# Altium PCB eSAS_BNC_fanout.PCBDOC
Units mil, origin at the board's own origin, x right, y up, seen from the top; angles counter-clockwise.
Board outline 4226.66 x 2258.09 mil, 2 copper layers (TopLayer, BottomLayer), stack 61.855 mil thick; 68 components, 47 nets, 212 pads, 750 vias.
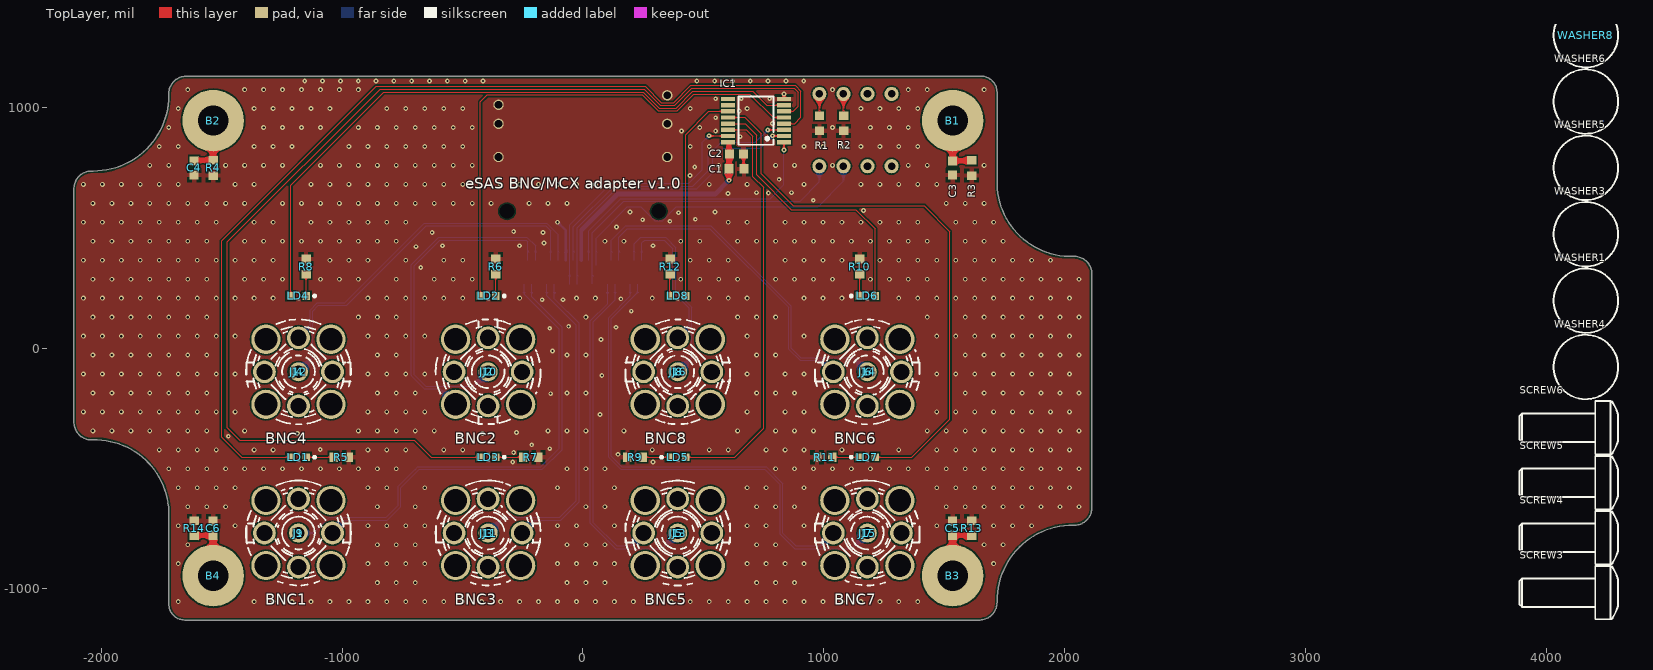
[diagram p0: TopLayer view]
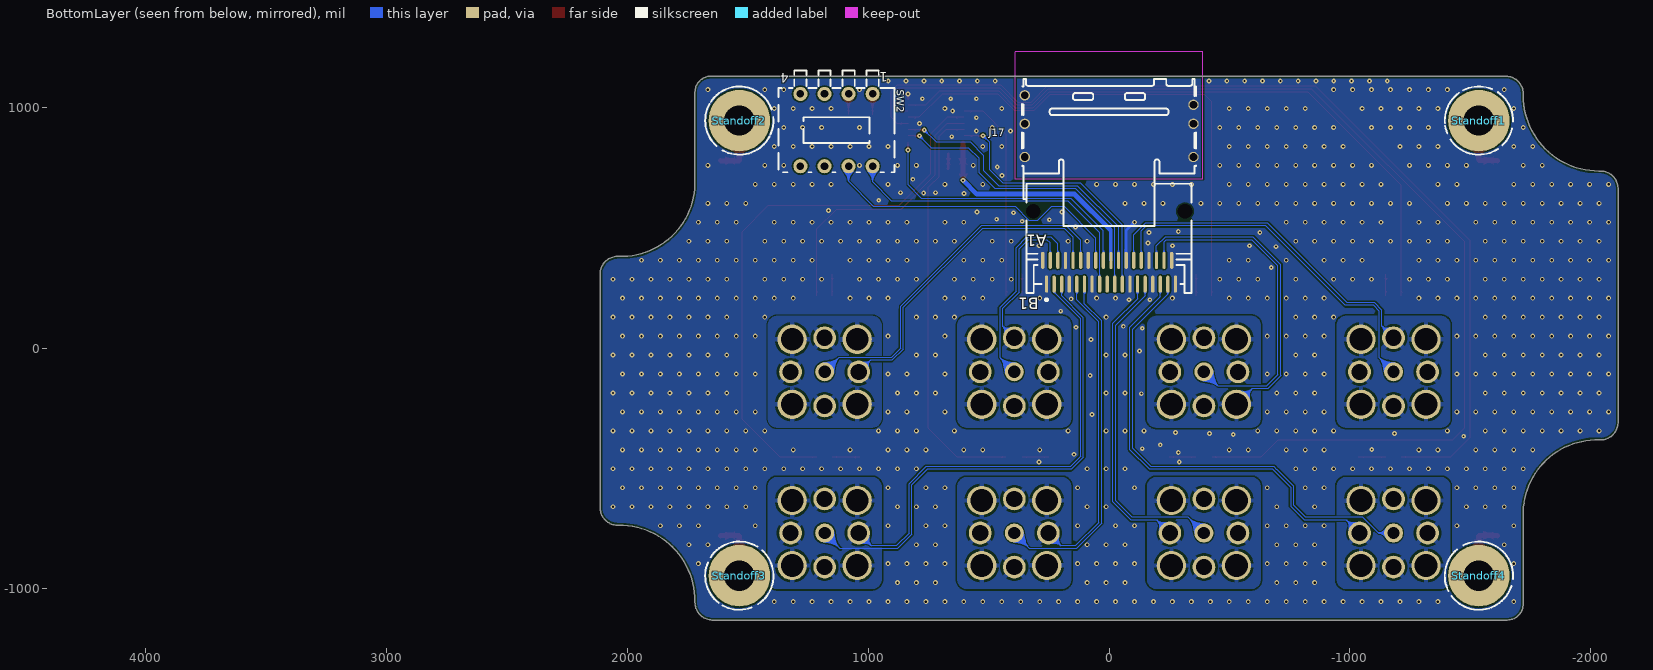
[diagram p1: BottomLayer view, seen from below]

## Layer stack, top to bottom
TopSolder: solder mask 0.4, Solder Resist, Dk 3.5
TopLayer: signal copper 1.4
Dielectric 3: prepreg 59.0551, Dk 4.2
BottomLayer: signal copper 1.4
BottomSolder: solder mask 0.4, Solder Resist, Dk 3.5

## Board outline
-1719.62,-1062.45 -1719.62,-680.62 -1719.63,-679.6 ccw(c-2026.62,-688.03) -2035.06,-381.04 -2036.51,-381.06 cw(c-2040.37,-308.08) -2113.03,-315.93 -2113.29,-311.33 -2113.29,665.65 -2113.04,670.26 cw(c-2040.38,662.41) -2036.51,735.4 -2033.49,735.32 ccw(c-2033.5,1049.25) -1719.58,1049.25 -1719.65,1052.27 cw(c-1646.66,1056.13) -1654.52,1128.79 -1649.91,1129.05 1653.55,1129.05 1653.77,1129.04 cw(c1653.55,1063) 1719.58,1063.22 1719.6,1063 1719.6,681.17 1719.63,679.6 ccw(c2026.63,688.04) 2035.07,381.05 2036.52,381.07 cw(c2040.38,308.09) 2113.04,315.94 2113.3,314.97 2113.3,-665.64 2113.36,-666.27 cw(c2040.38,-662.41) 2036.52,-735.39 2036.12,-735.33 ccw(c2033.5,-1049.24) 1719.59,-1051.87 1719.75,-1056.12 cw(c1646.67,-1056.12) 1654.52,-1128.78 1649.91,-1129.04 -1653.54,-1129.04 -1653.76,-1129.03 cw(c-1653.54,-1062.99)

## Design rules (kind name [scope] priority, off if disabled: settings)
BoardOutlineClearance [All] p1: gap=10 ignorepadtopadclearanceinfootprint=FALSE except(0: Arc-SplitContinuation Track-SplitContinuation SMDPad-SplitContinuation THPad-SplitContinuation Via-SplitContinuation Fill-SplitContinuation Poly-SplitContinuation Region-SplitContinuation Text-SplitContinuation)
Clearance [All] p1: gap=6 ignorepadtopadclearanceinfootprint=FALSE
ComponentClearance ComponentClearance_standof_MH [HasFootprint('ETTINGER_005.13.103') vs HasFootprint('MTG270_500')] p1: gap=10 collisioncheckmode=3 verticalgap=-275.59 showdistances=FALSE
ComponentClearance ComponentClearance_BNC_SPX [HasFootprint('AMPHENOL_919-109J-51PX') vs HasFootprint('TYCO_5-1634506-1')] p2: gap=-393.7 collisioncheckmode=3 verticalgap=100000 showdistances=TRUE
ComponentClearance [All] p3: gap=0 collisioncheckmode=3 verticalgap=100000 showdistances=FALSE
DiffPairsRouting [InDifferentialPairClass('All Differential Pairs')] p1: maxlimit=5 minlimit=5 mostfreqgap=5 toplayer_minwidth=150.47 toplayer_maxwidth=150.47 toplayer_prefwidth=150.47 bottomlayer_minwidth=150.47 bottomlayer_maxwidth=150.47 bottomlayer_prefwidth=150.47 impedanceprofiledriven=TRUE impedanceprofileid={AE919443-835C-48A8-A9B8-3D3E97AE2A3C} impedanceprofilevalue=50.000000 maxuncoupledlength=500
FabricationTestPointUsage TestPointUsage [All] p1: valid=0 allowmultiple=FALSE
FabricationTestpoint Testpoint [All] p1: side=3 testpointundercomponent=TRUE minsize=40 maxsize=100 preferedsize=60 minholesize=20 maxholesize=40 preferedholesize=32 testpointgrid=1 allowsidetop=TRUE allowsidebottom=TRUE usegrid=TRUE gridtolerance=0.01
Height [All] p1: minheight=0 maxheight=1574.8 prefheight=1574.8
HoleSize [All] p1: absolutevalues=TRUE maxlimit=150 minlimit=1 maxpercent=80.000 minpercent=20.000
HoleToHoleClearance HoleToHoleClearance_standoff_to_MH [HasFootprint('MTG270_500') vs HasFootprint('ETTINGER_005.13.103')] p1: gap=-275.59 allowstackedmicrovias=TRUE
HoleToHoleClearance HoleToHoleClearance_BNC_ZPX [HasFootprint('AMPHENOL_919-109J-51PX') vs HasFootprint('TYCO_5-1634506-1')] p2: gap=-393.7 allowstackedmicrovias=TRUE
HoleToHoleClearance [All] p3: gap=1 allowstackedmicrovias=TRUE
MinimumSolderMaskSliver [All] p1: minsoldermaskwidth=0
PlaneClearance [All] p1: clearance=7.87
PlaneConnect [All] p1: planeconnectstyle=Direct reliefexpansion=20 reliefentries=4 reliefconductorwidth=10 reliefairgap=10
PolygonConnect PolygonConnect_eSAS [All vs HasFootprint('MOLEX_75783-0107')] p1: connectstyle=Direct reliefconductorwidth=10 reliefentries=4 polygonreliefangle="90 Angle" airgapwidth=10
PolygonConnect PolygonConnect_pad [(InPadClass('All Pads'))] p2: connectstyle=Relief reliefconductorwidth=19.68 reliefentries=4 polygonreliefangle="90 Angle" airgapwidth=10
PolygonConnect [All] p3: connectstyle=Direct reliefconductorwidth=10 reliefentries=4 polygonreliefangle="45 Angle" airgapwidth=10
RoutingVias [All] p1: holewidth=7.87 width=19.68 viastyle="Through Hole" minholewidth=7.87 minwidth=19.68 maxholewidth=28 maxwidth=50
SilkToSilkClearance [All] p1: silktosilkclearance=0
SilkToSolderMaskClearance SilkscreenOverComponentPads [IsPad] p1: minsilkscreentomaskgap=0 clearancetoexposedcopper=TRUE
SolderMaskExpansion [All] p1: expansion=2 istentingtop=FALSE
SupplyNets "Schematic Supply Nets" [InNet('AFE0_CSN1')] p1 off: voltage=0.000
SupplyNets "Schematic Supply Nets_2" [InNet('GND')] p2 off: voltage=0.000
ViasUnderSMD [All] p1 off: allowed=FALSE
Width [All] p1: maxlimit=50 minlimit=5 preferedwidth=5
18 further rules are at their usual default settings.

## Components (designator, comment, footprint, x,y, rotation, side; value= is the part's Value field where it differs from the comment)
B1 "Plated Hole" MTG270_500 1535.44,944.89 r0 top
B2 "Plated Hole" MTG270_500 -1535.43,944.89 r0 top
B3 "Plated Hole" MTG270_500 1535.44,-944.88 r0 top
B4 "Plated Hole" MTG270_500 -1535.43,-944.88 r0 top
C1 "100nF" CAPC1608X87N 637.8,744.09 r180 top
C2 "22uF" CAPC1608X90N 637.8,807.09 r180 top
C3 "100nF" CAPC1608X90N 1535.44,748.04 r270 top
C4 "100nF" CAPC1608X90N -1614.17,748.03 r270 top
C5 "100nF" CAPC1608X90N 1535.43,-748.03 r90 top
C6 "100nF" CAPC1608X90N -1535.43,-748.03 r90 top
IC1 "CD74HC4094PW" SOP65P640X120-16N 718.5,944.88 r180 top
J1 "BNC" TYCO_5-1634506-1 -1181.1,-767.72 r180 top
J2 "BNC" TYCO_5-1634506-1 -393.7,-98.43 r270 top
J3 "BNC" TYCO_5-1634506-1 -393.7,-767.72 r180 top
J4 "BNC" TYCO_5-1634506-1 -1181.1,-98.43 r180 top
J5 "BNC" TYCO_5-1634506-1 393.7,-767.72 r180 top
J6 "BNC" TYCO_5-1634506-1 1181.1,-98.43 r180 top
J7 "BNC" TYCO_5-1634506-1 1181.1,-767.72 r180 top
J8 "BNC" TYCO_5-1634506-1 393.7,-98.43 r180 top
J9 "MCX" AMPHENOL_919-109J-51PX -1181.1,-767.72 r45 top
J10 "MCX" AMPHENOL_919-109J-51PX -393.7,-98.43 r45 top
J11 "MCX" AMPHENOL_919-109J-51PX -393.7,-767.72 r45 top
J12 "MCX" AMPHENOL_919-109J-51PX -1181.1,-98.43 r45 top
J13 "MCX" AMPHENOL_919-109J-51PX 393.7,-767.72 r45 top
J14 "MCX" AMPHENOL_919-109J-51PX 1181.1,-98.43 r45 top
J15 "MCX" AMPHENOL_919-109J-51PX 1181.1,-767.72 r45 top
J16 "MCX" AMPHENOL_919-109J-51PX 393.7,-98.43 r45 top
J17 "iPass™" MOLEX_75783-0107 0,314.96 r0 bottom
LD1 "Green" LED_KINGBRIGHT_KP-1608CGCK -1181.1,-452.75 r180 top
LD2 "Green" LED_KINGBRIGHT_KP-1608CGCK -393.7,216.54 r180 top
LD3 "Green" LED_KINGBRIGHT_KP-1608CGCK -393.7,-452.75 r180 top
LD4 "Green" LED_KINGBRIGHT_KP-1608CGCK -1181.1,216.54 r180 top
LD5 "Green" LED_KINGBRIGHT_KP-1608CGCK 393.7,-452.75 r0 top
LD6 "Green" LED_KINGBRIGHT_KP-1608CGCK 1181.1,216.53 r0 top
LD7 "Green" LED_KINGBRIGHT_KP-1608CGCK 1181.1,-452.76 r0 top
LD8 "Green" LED_KINGBRIGHT_KP-1608CGCK 393.7,216.53 r0 top
MECH1 "61000-007" GENERIC_MECH 3486.98,-4881.1 r90 top
R1 "1k" RESC1608X55N 982.43,933.65 r270 top
R2 "1k" RESC1608X55N 1082.43,933.65 r270 top
R3 "1M" RESC1608X55N 1614.17,748.03 r270 top
R4 "1M" RESC1608X55N -1535.43,748.04 r270 top
R5 "750" RESC1608X55N -1003.94,-452.75 r0 top
R6 "750" RESC1608X55N -362.2,338.58 r90 top
R7 "750" RESC1608X55N -216.53,-452.75 r0 top
R8 "750" RESC1608X55N -1149.61,338.58 r90 top
R9 "750" RESC1608X55N 216.54,-452.76 r180 top
R10 "750" RESC1608X55N 1149.61,338.58 r90 top
R11 "750" RESC1608X55N 1003.93,-452.76 r180 top
R12 "750" RESC1608X55N 362.2,338.58 r90 top
R13 "1M" RESC1608X55N 1614.17,-748.03 r90 top
R14 "1M" RESC1608X55N -1614.17,-748.03 r90 top
SCREW3 "M3x8" BOSSARD_BN5687-3061606_h 4203.74,-1015.4 r0 top
SCREW4 "M3x8" BOSSARD_BN5687-3061606_h 4203.74,-787.06 r0 top
SCREW5 "M3x8" BOSSARD_BN5687-3061606_h 4203.74,-558.71 r0 top
SCREW6 "M3x8" BOSSARD_BN5687-3061606_h 4203.74,-330.36 r0 top
Standoff1 "=Value" ETTINGER_005.13.103 -1535.43,944.89 r180 bottom
Standoff2 "=Value" ETTINGER_005.13.103 1535.44,944.89 r180 bottom
Standoff3 "=Value" ETTINGER_005.13.103 1535.43,-944.88 r180 bottom
Standoff4 "=Value" ETTINGER_005.13.103 -1535.43,-944.88 r180 bottom
SW2 "Switch" SW_OMRON_A6DR-4100 1131.89,905.51 r270 bottom
WASHER1 "D6xd3.2" BOSSARD_BN83728-8243964_v 4164.74,197.19 r270 top
WASHER2 "D6xd3.2" BOSSARD_BN83728-8243964_v 4164.74,1850.74 r270 top
WASHER3 "D6xd3.2" BOSSARD_BN83728-8243964_v 4164.74,472.79 r270 top
WASHER4 "D6xd3.2" BOSSARD_BN83728-8243964_v 4164.74,-78.4 r270 top
WASHER5 "D6xd3.2" BOSSARD_BN83728-8243964_v 4164.74,748.38 r270 top
WASHER6 "D6xd3.2" BOSSARD_BN83728-8243964_v 4164.74,1023.97 r270 top
WASHER7 "D6xd3.2" BOSSARD_BN83728-8243964_v 4164.74,1575.15 r270 top
WASHER8 "D6xd3.2" BOSSARD_BN83728-8243964_v 4164.74,1299.56 r270 top

## Footprints (in the part's own frame and the unit in brackets; to place one, negate y for a bottom-side part, rotate by r counter-clockwise, add the part's x,y. Pads: shape width x height; smd on the part's side, far side on the other; paste and mask are expansions set on the pad)
AMPHENOL_919-109J-51PX [mm] "50 Ohm, RF Connector, MCX Straight PCB Receptacle Jack"
  round 1.9 hole 1.2: 1(0,0)
  round 2.4 hole 1.7: 2(-2.54,-2.54) 2(-2.54,2.54) 2(2.54,2.54) 2(2.54,-2.54)
  silkscreen extent -3,-3 3,3, body extent -3,-3 3,3, height 6.06
BOSSARD_BN5687-3061606_h [mil] "M3 L=8mm Hexalobular Socket Pan Head Screw, Fully Threaded - Stainless Steel A2"
  silkscreen extent -315,-110 94,110, body extent -315,-110 94,110, height 110
BOSSARD_BN83728-8243964_v [mil] "Waved Spring Washer for M3 Screw - Steel 440-520 HV - Zinc Plated Blue"
  silkscreen extent -134,-134 134,134, body extent -118,-118 118,118, height 16
CAPC1608X87N [mm] "Chip Capacitor, Body 1.6x0.8mm IPC Medium Density"
  rect 0.95x1 smd: 1(-0.8,0) 2(0.8,0)
  body extent -0.87,-0.47 0.88,0.48, height 0.87
CAPC1608X90N [mm] "Chip Capacitor, Body 1.6x0.8mm IPC Medium Density"
  rect 0.95x0.95 smd: 1(-0.75,0) 2(0.75,0)
  body extent -0.85,-0.45 0.85,0.45, height 0.9
ETTINGER_005.13.103 [mm] "Standoff Nickel-Plated Brass M/F AF5.5x10 F=M3x6.5 M=M3x6"
  round 6.5 hole 3.2: 1(0,0)
  silkscreen extent -3.6,-3.6 3.6,3.6, body extent -3.18,-2.75 3.18,2.75, height 10
GENERIC_MECH [mil]
LED_KINGBRIGHT_KP-1608CGCK [mm] "SMT Green LED, Case 0603, Body L 1.60mm x W 0.80mm x H 1.10mm"
  rect 0.8x0.8 smd: 1(-0.825,0) 2(0.825,0)
  silkscreen extent -1.83,-0.4 0.08,0.4, body extent -0.8,-0.4 0.8,0.4, height 1.1
MOLEX_75783-0107 [mm] "36 Circuit, Right Angle , Internal Assembly, iPass™ I/O Surface Mount Receptacle with Left Key Shell"
  oval 0.35x1.8 smd: A1(7,-1.255) A2(6.2,-1.255) A3(5.4,-1.255) A4(4.6,-1.255) A5(3.8,-1.255) A6(3,-1.255) A7(2.2,-1.255) A8(1.4,-1.255) A9(0.6,-1.255) A10(-0.2,-1.255) A11(-1,-1.255) A12(-1.8,-1.255) A13(-2.6,-1.255) A14(-3.4,-1.255) A15(-4.2,-1.255) A16(-5,-1.255) A17(-5.8,-1.255) A18(-6.6,-1.255) B1(6.6,1.255) B2(5.8,1.255) B3(5,1.255) B4(4.2,1.255) B5(3.4,1.255) B6(2.6,1.255) B7(1.8,1.255) B8(1,1.255) B9(0.2,1.255) B10(-0.6,1.255) B11(-1.4,1.255) B12(-2.2,1.255) B13(-3,1.255) B14(-3.8,1.255) B15(-4.6,1.255) B16(-5.4,1.255) B17(-6.2,1.255) B18(-7,1.255)
  round 0.5 hole 1.55 unplated mask+0.525: MTG1(-8,-6.435) MTG2(8,-6.435)
  round 1.1 hole 0.8: SHELL1(-8.9,-12.155) SHELL2(-8.9,-15.655) SHELL3(-8.9,-17.655) SHELL4(8.9,-12.155) SHELL5(8.9,-15.655) SHELL6(8.9,-18.655)
  TopLayer keep-out lines w0.1: -9.9,-9.835 -9.9,-23.235 9.9,-23.235 9.9,-9.835 -9.9,-9.835
  silkscreen extent -9.17,-20.41 9.18,3.02, body extent -9.17,-20.41 9.18,2.17, height 8.62
MTG270_500 [mm] "Plated Through Hole: Hole Dia.=2.7mm Pad Dia.=5.0mm"
  round 5 hole 2.7: 1(0,0)
RESC1608X55N [mm] "Chip Resistor, EIA 0603, Metric 1608, Body 1.6x0.8mm, IPC Medium Density"
  rect 0.9x1 smd: 1(-0.8,0) 2(0.8,0)
  body extent -0.87,-0.47 0.88,0.48, height 0.55
SOP65P640X120-16N [mm] "SOP, 0.65mm pitch; 16 pin, 4.40mm W X 5.00mm L X 1.20mm H body IPC Medium Density"
  rect 1.45x0.45 smd: 1(-2.95,2.275) 2(-2.95,1.625) 3(-2.95,0.975) 4(-2.95,0.325) 5(-2.95,-0.325) 6(-2.95,-0.975) 7(-2.95,-1.625) 8(-2.95,-2.275) 9(2.95,-2.275) 10(2.95,-1.625) 11(2.95,-0.975) 12(2.95,-0.325) 13(2.95,0.325) 14(2.95,0.975) 15(2.95,1.625) 16(2.95,2.275)
  silkscreen extent -1.85,-2.55 1.85,2.55, body extent -3.12,-2.55 3.12,2.55, height 1.2
SW_OMRON_A6DR-4100 [mm] "Pitch 2.54mm, Body 12.2x8.9mm, 4 Ways SPST Sealed Piano DIP Switch, OMRON A6DR"
  round 1.5 hole 0.8: 1(-3.81,3.81) 2(-3.81,1.27) 3(-3.81,-1.27) 4(-3.81,-3.81) 5(3.81,-3.81) 6(3.81,-1.27) 7(3.81,1.27) 8(3.81,3.81)
  silkscreen extent -6.3,-6.1 4.45,6.1, body extent -6.3,-6.1 4.45,6.1, height 6.4
TYCO_5-1634506-1 [mm] "50 Ohm BNC PCB Receptacle (Jack), Post Terminal, 4 Legs"
  round 2 hole 1.3: 1(0,0)
  round 3.1 hole 2.4: 2(-3.43,3.43) 2(-3.43,-3.43) 2(3.43,3.43) 2(3.43,-3.43)
  silkscreen extent -5.53,-5.53 5.53,5.53, body extent -5.5,-5.5 5.5,5.5, height 16.7

## Part data
B1 B2 B3 B4: library part PLATED_HOLE2.7_PAD5.0, "Single Terminal Socket", Author="CERN DEM JMW", Component Type="Standard (No BOM)", ComponentHeight=0mm, CreateDate=27.09.2011, Family="Plated Hole", HelpURL=Undefined, LatestRevisionDate=27.09.2011, Mounted=No, PackageDescription="Plated Through Hole: Hole Dia.=2.7mm Pad Dia.=5.0mm", Part Description="Plated Through Hole: Hole Dia.=2.7mm Pad Dia.=5.0mm", Part Number=PLATED_HOLE2.7_PAD5.0, Pin Count=1, Sense=No, SMD=No, Socket=No, Status=None
C1: library part CC0603_100NF_50V_10%_X7R, "Non-polarised capacitor", Case=0603, Manufacturer=GENERIC, Manufacturer1 ComponentHeight=0.87mm, Manufacturer1 Example=PHYCOMP, Manufacturer1 Part Number=223858615649, Tolerance=±10%, Voltage=50V, Author="CERN DEM JLC", Component Type=Standard, CreateDate=03.12.2007, HelpURL=\\cern.ch\dfs\Applications\Altium\Datasheets\CC0603_X7R_PHYCOMP.pdf, LatestRevisionDate=03.12.2007, Manufacturer Part Number=CC0603_100NF_50V_10%_X7R, Mounted=Yes, Part Description="SMD Multilayer Chip Ceramic Capacitor", Part Number=CC0603_100NF_50V_10%_X7R, Pin Count=2, Sense=No, SMD=Yes, Socket=No, Status=Preferred, TC=X7R
C2: library part CC0603_22UF_10V_20%_X5R, "Non-polarised capacitor", Case=0603, Manufacturer=GENERIC, Manufacturer1 ComponentHeight=0.9mm, Manufacturer1 Example=TDK, Manufacturer1 Part Number=C1608X5R1A226M080, Tolerance=±20%, Voltage=10V, Author="CERN DEM BC", Component Type=Standard, CreateDate=03.12.2020, HelpURL=\\cern.ch\dfs\Applications\Altium\Datasheets\CC0603_X5R_TDK_C.pdf, LatestRevisionDate=03.12.2020, Manufacturer Part Number=CC0603_22UF_10V_20%_X5R, Mounted=Yes, Part Description="SMD Multilayer Chip Ceramic Capacitor", Part Number=CC0603_22UF_10V_20%_X5R, Pin Count=2, Sense=No, SMD=Yes, Socket=No, Status=None, TC=X5R
C3 C4 C5 C6: library part CC0603_100NF_100V_10%_X7R, "Non-polarised capacitor", Case=0603, Manufacturer=GENERIC, Manufacturer1 ComponentHeight=0.9mm, Manufacturer1 Example=MURATA, Manufacturer1 Part Number=GRM188R72A104KA35D, Tolerance=±10%, Voltage=100V, Author="CERN DEM JLC", Component Type=Standard, CreateDate=11.12.2013, HelpURL=\\cern.ch\dfs\Applications\Altium\Datasheets\CC0603_MURATA_GRM188R72A104KA35D.pdf, LatestRevisionDate=11.12.2013, Manufacturer Part Number=CC0603_100NF_100V_10%_X7R, Mounted=Yes, Part Description="SMD Multilayer Chip Ceramic Capacitor", Part Number=CC0603_100NF_100V_10%_X7R, Pin Count=2, Sense=No, SMD=Yes, Socket=No, Status=None, TC=X7R
IC1: "High−Speed CMOS Logic, 8−Stage Shift and Store Bus Register, Three−State", Case=TSSOP16, Manufacturer="TEXAS INSTRUMENTS", Author="CERN DEM MR", Bonding=No, Component Type=Standard, ComponentHeight=1.2mm, CreateDate=08.03.2016, Device=CD74HC4094PW, HelpURL=\\cern.ch\dfs\Applications\Altium\Datasheets\CD74HC4094PW.pdf, LatestRevisionDate=08.03.2016, Manufacturer Part Number=CD74HC4094PW, Mounted=Yes, PackageDescription="SOP, 0.65mm Pitch; 16 Pin, 4.40mm W X 5.00mm L X 1.20mm H body, IPC Medium Density", Part Description="High−Speed CMOS Logic, 8−Stage Shift and Store Bus Register, Three−State", Part Number=CD74HC4094PW, Pin Count=16, PressFit=No, Sense=No, SMD=Yes, Socket=No
J1 J2 J3 J4 J5 J6 J7 J8: library part TYCO_5-1634506-1, Manufacturer="TYCO ELECTRONICS", Manufacturer Part Number=5-1634506-1, Author="CERN DEM JLC", Component Type=Standard, ComponentHeight=16.7mm, CreateDate=14.02.2011, Family=BNC, HelpURL=\\cern.ch\dfs\Applications\Altium\Datasheets\TYCO_5-1634506-1.pdf, LatestRevisionDate=14.02.2011, Mounted=Yes, Part Description="50 Ohms BNC PCB Straight Socket", Part Number=TYCO_5-1634506-1, Pin Count=2, PressFit=No, Sense=No, SMD=No, Socket=No, Status=None
J9 J10 J11 J12 J13 J14 J15 J16: library part AMPHENOL_919-109J-51PX, Manufacturer=AMPHENOL, Manufacturer Part Number="919-109J-51PX (MCX6251B1-3GT30G-50)", Author="CERN DEM BC", Component Type=Standard, ComponentHeight=6.06mm, CreateDate=31.01.2019, Family=MCX, HelpURL=\\cern.ch\dfs\Applications\Altium\Datasheets\AMPHENOL_919-109J-51PX.pdf, LatestRevisionDate=31.01.2019, Mounted=Yes, Part Description="50 Ohm, RF Connector, MCX Straight PCB Receptacle Jack", Part Number=AMPHENOL_919-109J-51PX, Pin Count=5, PressFit=No, Sense=No, SMD=No, Socket=No, Status=None
J17: library part MOLEX_75783-0107, "36 Circuit, Right Angle , Internal Assembly, iPass™ I/O Surface Mount Receptacle with Left Key Shell", Manufacturer=MOLEX, Manufacturer Part Number="75783-0107 / 75783-0136", Part Number="MOLEX 75783-0107 / 75783-0136", Author="CERN DEM JLC", Component Type=Standard, ComponentHeight=8.47mm, CreateDate=12.11.2014, Family=iPass™, HelpURL=\\cern.ch\dfs\Applications\Altium\Datasheets\MOLEX_75783-0107.pdf, LatestRevisionDate=12.11.2014, Mounted=Yes, Part Description="36 Circuit, Right Angle , Internal Assembly, iPass™ I/O Surface Mount Receptacle with Left Key Shell", Pin Count=42, PressFit=No, Sense=No, SMD=Yes, Socket=No, Status=None
LD1 LD2 LD3 LD4 LD5 LD6 LD7 LD8: library part LED_KINGBRIGHT_KP-1608CGCK, "LED Green 1C 2A", Case=0603, Manufacturer=KINGBRIGHT, Manufacturer Part Number=KP-1608CGCK, Author="CERN DEM HF", Bonding=No, Color=Green, Component Type=Standard, ComponentHeight=1.1mm, CreateDate=01.10.2021, HelpURL=\\cern.ch\dfs\Applications\Altium\Datasheets\LED_KINGBRIGHT_KP-1608CGCK.pdf, LatestRevisionDate=01.10.2021, Mounted=Yes, PackageDescription="SMT Green LED, Case 0603, Body L 1.60mm x W 0.80mm x H 1.10mm", Part Description="1.6x0.8mm SMD Chip Green LED Lamp", Part Number=LED_KINGBRIGHT_KP-1608CGCK, Pin Count=2, PressFit=No, Sense=No, SMD=Yes, Socket=No
MECH1: library part Generic_mechanical, "PCB Solder Side Cover, 3 U, 100 mm x 160 mm, 55°C Schroff insulating plate", Manufacturer=Schroff, Author=GK, Component Type=Standard, ComponentHeight=generic, CreateDate=28.10.2019, LatestRevisionDate=28.10.2019, Manufacturer Part Number=61000-007, Mounted=Yes, PackageDescription=generic, Part Description="PCB Solder Side Cover, 3 U, 100 mm x 160 mm, 55°C Schroff insulating plate", Part Number=61000-007, Pin Count=0, PressFit=No, Sense=No, SMD=No, Socket=No, Status=None
R1 R2: library part R0603_1K_1%_0.1W_100PPM, "Resistor - 1%", Case=0603, Manufacturer=GENERIC, Manufacturer1 ComponentHeight=0.55mm, Manufacturer1 Example="NIC COMPONENT", Manufacturer1 Part Number=NRC06F1001TRF, Power=0.1W, Tolerance=±1%, Author="CERN DEM JLC", Component Type=Standard, CreateDate=03.12.2007, HelpURL=\\cern.ch\dfs\Applications\Altium\Datasheets\R0603_NIC_NRC.pdf, LatestRevisionDate=13.03.2008, Manufacturer Part Number=R0603_1K_1%_0.1W_100PPM, Mounted=Yes, Part Description="General Purpose Thick Film Chip Resistor", Part Number=R0603_1K_1%_0.1W_100PPM, Pin Count=2, PressFit=No, Sense=No, SMD=Yes, Socket=No, Status=Preferred, TC=±100ppm/°C
R3 R4 R13 R14: library part R0603_1M_1%_0.1W_100PPM, "Resistor - 1%", Case=0603, Manufacturer=GENERIC, Manufacturer1 ComponentHeight=0.55mm, Manufacturer1 Example="NIC COMPONENT", Manufacturer1 Part Number=NRC06F1004TRF, Power=0.1W, Tolerance=±1%, Author="CERN DEM JLC", Component Type=Standard, CreateDate=03.12.2007, HelpURL=\\cern.ch\dfs\Applications\Altium\Datasheets\R0603_NIC_NRC.pdf, LatestRevisionDate=13.03.2008, Manufacturer Part Number=R0603_1M_1%_0.1W_100PPM, Mounted=Yes, Part Description="General Purpose Thick Film Chip Resistor", Part Number=R0603_1M_1%_0.1W_100PPM, Pin Count=2, PressFit=No, Sense=No, SMD=Yes, Socket=No, Status=Preferred, TC=±100ppm/°C
R5 R6 R7 R8 R9 R10 R11 R12: library part R0603_750R_1%_0.1W_100PPM, "Resistor - 1%", Case=0603, Manufacturer=GENERIC, Manufacturer1 ComponentHeight=0.55mm, Manufacturer1 Example="NIC COMPONENT", Manufacturer1 Part Number=NRC06F7500TRF, Power=0.1W, Tolerance=±1%, Author="CERN DEM JLC", Component Type=Standard, CreateDate=03.12.2007, HelpURL=\\cern.ch\dfs\Applications\Altium\Datasheets\R0603_NIC_NRC.pdf, LatestRevisionDate=13.03.2008, Manufacturer Part Number=R0603_750R_1%_0.1W_100PPM, Mounted=Yes, Part Description="General Purpose Thick Film Chip Resistor", Part Number=R0603_750R_1%_0.1W_100PPM, Pin Count=2, PressFit=No, Sense=No, SMD=Yes, Socket=No, Status=Preferred, TC=±100ppm/°C
SCREW3 SCREW4 SCREW5 SCREW6: library part BOSSARD_BN5687-3061606_h, "Screw", Manufacturer=BOSSARD, Manufacturer Part Number="BN5687 Art.3061606", Author="CERN DEM JLC", Component Type=Mechanical, ComponentHeight=5.6mm, CreateDate=07.02.2013, HelpURL=\\cern.ch\dfs\Applications\Altium\Datasheets\BOSSARD_BN5687-3061606.pdf, LatestRevisionDate=07.02.2013, Mounted=Yes, PackageDescription="M3 L=8mm Hexalobular Socket Pan Head Screw, Fully Threaded - Stainless Steel A2", Part Description="M3 L=8mm Hexalobular Socket Pan Head Screw, Fully Threaded, Stainless Steel A2", Part Number=BOSSARD_BN5687-3061606_h, Pin Count=0, PressFit=No, Sense=No, SMD=No, Socket=No, Status=None
Standoff1 Standoff2 Standoff3 Standoff4: library part ETTINGER_005.13.103, "Standoff Male-Female", Manufacturer=ETTINGER, Manufacturer Part Number=005.13.103, Author="CERN DEM HF", Component Type=Mechanical, ComponentHeight=10mm, CreateDate=17.05.2023, HelpURL=\\cern.ch\dfs\Applications\Altium\Datasheets\ETTINGER_005.13.103.pdf, LatestRevisionDate=17.05.2023, Mounted=Yes, PackageDescription="Standoff Nickel-Plated Brass M/F AF5.5x10 F=M3x6.5 M=M3x6", Part Description="Standoff Nickel-Plated Brass M/F AF5.5x10 F=M3x6.5 M=M3x6", Part Number=ETTINGER_005.13.103, Pin Count=1, PressFit=No, Sense=No, SMD=No, Socket=No, Status=None
SW2: library part SW_OMRON_A6DR-4100, "4 Ways SPST DIP Switch", Manufacturer=OMRON, Manufacturer Part Number=A6DR-4100, Author="CERN DEM JLC", Component Type=Standard, ComponentHeight=7.6mm, CreateDate=01.04.2014, Family=Switch, HelpURL=\\cern.ch\dfs\Applications\Altium\Datasheets\SW_OMRON_A6DR-4100.pdf, LatestRevisionDate=01.04.2014, Mounted=Yes, PackageDescription="Pitch 2.54mm, Body 12.2x8.9mm, 4 Ways SPST Sealed Piano DIP Switch, OMRON A6DR", Part Description="4 Ways SPST Sealed Piano DIP Switch, Contact Rating 30mA 30VDC", Part Number=SW_OMRON_A6DR-4100, Pin Count=8, PressFit=No, Sense=No, SMD=No, Socket=No, Status=None
WASHER1 WASHER2 WASHER3 WASHER4 WASHER5 WASHER6 WASHER7 WASHER8: library part BOSSARD_BN83728-8243964_v, "Washer", Manufacturer=BOSSARD, Manufacturer Part Number="BN83728 Art.8243964", Author="CERN DEM JLC", Component Type=Mechanical, ComponentHeight=0.4mm, CreateDate=27.04.2017, HelpURL=\\cern.ch\dfs\Applications\Altium\Datasheets\BOSSARD_BN83728-8243964.pdf, LatestRevisionDate=27.04.2017, Mounted=Yes, PackageDescription="Waved Spring Washer for M3 Screw, Steel 440-520 HV, Zinc Plated Blue", Part Description="Waved Spring Washer for M3 Screw - Steel 440-520 HV - Zinc Plated Blue", Part Number=BOSSARD_BN83728-8243964_v, Pin Count=0, PressFit=No, Sense=No, SMD=No, Socket=No, Status=None

## Via types
v1: diameter 20, hole 10, TopLayer to BottomLayer, 668 vias
v2: diameter 19.68, hole 7.87, TopLayer to BottomLayer, 82 vias

## Nets (pads, with @x,y where several pads share a name; then routed paths per layer and width w, separated by ;. In a path a pad name is that pad's centre, name@x,y a point inside that pad or via, vN(x,y) a via of type N, cw(c..) or ccw(c..) an arc to the next point about the centre after c; other vN are vias at no path point)
AFE0_CSN0: IC1.15 J17.B11 | length 1124.3
  TopLayer w5: v2(523.62,881.89) 524.61,880.91 IC1.15
  BottomLayer w5: J17.B11 -55.12,511.81 117.68,684.6 440.51,684.6 496.06,740.16 496.06,854.33 v2(523.62,881.89)
AFE0_CSN1: C1.2 C2.2 IC1.16 J17.A10 | length 975.1
  TopLayer w20: v2(606.3,696.85) C1.2 IC1.16@606.3,851.38
  BottomLayer w14.5: J17.A10 -7.87,488.19
  BottomLayer w20: -5.12,490.94 143.67,639.74 549.18,639.74 v2(606.3,696.85)
AFE0_ID0: J17.B8 SW2.8 | length 1308.1
  BottomLayer w5: J17.B8@39.11,266.91 39.11,480.05 169.29,610.24 901.57,610.24 981.89,690.55 SW2.8
AFE0_ID1: J17.A8 SW2.7 | length 1346.8
  BottomLayer w5: J17.A8@55.12,345.07 J17.A8 55.12,456.69 185.04,586.61 240.16,586.61 297.48,529.3 331.12,529.3 388.44,586.61 976.38,586.61 1081.89,692.13 SW2.7
AFE0_MISO0: J17.B9
AFE0_MISO1: IC1.1 J17.A9 | length 1192.3
  TopLayer w5: v2(834.65,822.83) IC1.1
  BottomLayer w5: J17.A9 23.62,488.19 156.67,621.24 765,621.24 ; 766.91,621.24 765,621.24 ; v2(834.65,822.83) 834.65,678.65 777.24,621.24 765,621.24
AFE0_MOSI01: IC1.2 J17.B10 | length 1285.9
  TopLayer w5: v2(787.4,881.89) 788.39,880.91 IC1.2
  BottomLayer w5: J17.B10 -23.62,500 137.8,661.42 472.44,661.42 539.37,728.35 539.37,787.4 582.68,830.71 736.22,830.71 v2(787.4,881.89)
AFE0_SCLK01: IC1.3 J17.A11 | length 1217.2
  TopLayer w5: v2(767.72,905.51) 768.7,906.5 IC1.3
  BottomLayer w5: J17.A11 -39.37,503.94 129.11,672.42 455.88,672.42 519.68,736.22 519.68,799.21 574.8,854.33 716.54,854.33 v2(767.72,905.51)
DAC_OUT1_N: J1.2 J9.2 J17.B16 | length 1881.7
  BottomLayer w5: J9.2@-1039.68,-767.72 -986.67,-714.7 -812.42,-714.7 -755.41,-657.69 -755.41,-578.95 -680.4,-503.94 -169.29,-503.94 -86.61,-421.26 -86.61,86.87 -212.6,212.85 J17.B16
DAC_OUT1_P: J1.1 J9.1 J17.B17 | length 2017.8
  BottomLayer w5: J1.1 -1119.22,-767.72 -1054.21,-702.7 -817.39,-702.7 -767.41,-652.72 -767.41,-573.98 -697.68,-504.25 -696.26,-504.25 -684.95,-492.94 -174.04,-492.94 -97.61,-416.51 -97.61,77.93 -244.09,224.41 J17.B17
DAC_OUT2_N: J2.2 J10.2 J17.A16 | length 1332.2
  BottomLayer w5: J2.2@-528.74,-233.47 -593.72,-168.48 -658.1,-168.48 -711.79,-114.8 -711.79,-114.18 -712.6,-113.37 -712.6,346.46 -598.43,460.63 -232.46,460.63 -196.85,425.02 J17.A16
DAC_OUT2_P: J2.1 J10.1 J17.A17 | length 1400.3
  BottomLayer w5: J10.1 -452.76,-157.48 -653.54,-157.48 -700.79,-110.24 -700.79,342.71 -594.68,448.82 -236.2,448.82 -228.34,440.96 J17.A17
DAC_OUT3_N: J3.2 J11.2 J17.B13 | length 1236.1
  BottomLayer w5: J11.2@-252.28,-767.72 -199.26,-714.7 -92.65,-714.7 -15.75,-637.8 -15.75,102.36 -118.11,204.72 J17.B13
DAC_OUT3_P: J3.1 J11.1 J17.B14 | length 1372.2
  BottomLayer w5: J3.1 -328.68,-702.7 -96.4,-702.7 -26.75,-633.05 -26.75,94.47 -149.6,217.33 J17.B14
DAC_OUT4_N: J4.2 J12.2 J17.A13 | length 1442
  BottomLayer w5: J12.2@-1181.1,43 -1133.1,90.99 -1133.1,158.24 -1102.36,188.98 -988.19,188.98 -658.29,518.87 -149.69,518.87 -102.36,471.54 J17.A13
DAC_OUT4_P: J4.1 J12.1 J17.A14 | length 1542.9
  BottomLayer w5: J4.1 -1122.04,-39.37 -1122.04,153.55 -1098.43,177.17 -980.51,177.17 -649.8,507.87 -154.25,507.87 -133.86,487.48 J17.A14
DAC_OUT5_N: J5.2 J13.2 J17.B5 | length 1298.3
  BottomLayer w5: J17.B5 133.86,200.79 43.31,110.24 43.31,-724.41 139.63,-820.73 199.26,-820.73 J13.2@252.28,-767.72
DAC_OUT5_P: J5.1 J13.1 J17.B6 | length 1455.5
  BottomLayer w5: J17.B6 102.36,184.85 31.5,113.98 31.5,-728.15 136.07,-832.73 328.68,-832.73 J13.1
DAC_OUT6_N: J6.2 J14.2 J17.A5 | length 1348.7
  BottomLayer w5: J17.A5 149.61,460.63 185.04,496.06 527.56,496.06 854.33,169.29 854.33,-3.94 901.57,-51.18 992.44,-51.18 J14.2@1039.68,-98.43
DAC_OUT6_P: J6.1 J14.1 J17.A6 | length 1524.4
  BottomLayer w5: J17.A6 118.11,448.82 177.17,507.87 519.69,507.87 531.3,507.87 865.33,173.85 865.33,162.23 866.14,161.42 866.14,0 905.51,-39.37 1122.05,-39.37 J6.1
DAC_OUT7_N: J7.2 J15.2 J17.B2 | length 1978.4
  BottomLayer w5: J17.B2 228.35,232.28 117.3,121.24 117.3,-448.2 162.04,-492.94 760.65,-492.94 830.71,-562.99 830.71,-767.91 883.53,-820.73 986.67,-820.73 J15.2@1039.68,-767.72
DAC_OUT7_P: J7.1 J15.1 J17.B3 | length 2135
  BottomLayer w5: J17.B3 196.85,216.54 106.3,125.98 106.3,-452.76 157.48,-503.94 756.1,-503.94 819.71,-567.55 819.71,-772.46 879.98,-832.73 1116.09,-832.73 J15.1
DAC_OUT8_N: J8.2 J16.2 J17.A2 | length 639.8
  BottomLayer w5: J17.A2 244.1,437.01 255.91,448.82 338.58,448.82 374.02,413.39 374.02,232.28 440.94,165.35 440.94,90.24 J16.2@393.7,43
DAC_OUT8_P: J8.1 J16.1 J17.A3 | length 838.5
  BottomLayer w5: J17.A3 212.6,433.07 239.35,459.82 343.33,459.82 385.83,417.32 385.83,236.22 452.76,169.29 452.76,-39.37 J8.1
GND: C1.1 C2.1 C3.2 C4.2 C5.2 C6.2 IC1.8 J17.A1 J17.A4 J17.A7 J17.A12 J17.A15 J17.A18 J17.B1 J17.B4 J17.B7 J17.B12 J17.B15 J17.B18 J17.SHELL1 J17.SHELL2 J17.SHELL3 J17.SHELL4 J17.SHELL5 J17.SHELL6 R1.2 R2.2 R3.2 R4.2 R5.2 R6.2 R7.2 R8.2 R9.2 R10.2 R11.2 R12.2 R13.2 R14.2 | length 256.9
  TopLayer w10: C2.1 667.32,746.06 C1.1 ; IC1.8 v2(834.65,1055.12)
  BottomLayer w10: v1(-105.5,522.45) -70.87,487.81 -70.87,480.31 -70.86,392.91 J17.A12
  other v1: -1680.31,-1052.35 -1365.35,-1052.35 -1286.61,-1052.35 -1207.87,-1052.35 -1129.13,-1052.35 -1050.39,-1052.35 -971.65,-1052.35 -892.91,-1052.35 -814.17,-1052.35 -735.42,-1052.35 -656.68,-1052.35 -577.94,-1052.35 -499.2,-1052.35 -420.46,-1052.35 -341.72,-1052.35 -262.98,-1052.35 -184.24,-1052.35 -105.5,-1052.35 -26.76,-1052.35 51.98,-1052.35 130.72,-1052.35 209.46,-1052.35 288.2,-1052.35 366.94,-1052.35 445.68,-1052.35 524.42,-1052.35 603.16,-1052.35 681.9,-1052.35 760.64,-1052.35 839.38,-1052.35 918.12,-1052.35 996.86,-1052.35 1075.6,-1052.35 1154.34,-1052.35 1233.08,-1052.35 1311.82,-1052.35 1390.56,-1052.35 -853.54,-973.61 -774.8,-973.61 -696.05,-973.61 -66.13,-973.61 12.61,-973.61 91.35,-973.61 721.27,-973.61 800.01,-973.61 878.75,-973.61 -1680.31,-894.87 -892.91,-894.87 -814.17,-894.87 -735.42,-894.87 -656.68,-894.87 -105.5,-894.87 -26.76,-894.87 51.98,-894.87 130.72,-894.87 681.9,-894.87 760.64,-894.87 839.38,-894.87 918.12,-894.87 1705.52,-894.87 -1640.94,-816.13 -853.54,-816.13 -774.8,-816.13 -696.05,-816.13 -66.13,-816.13 12.61,-816.13 91.35,-816.13 721.27,-816.13 800.01,-816.13 1666.15,-816.13 1744.89,-816.13 -1680.31,-737.39 -1444.09,-737.39 -892.91,-737.39 -814.17,-737.39 -735.42,-737.39 -656.68,-737.39 -105.5,-737.39 -26.76,-737.39 130.72,-737.39 681.9,-737.39 760.64,-737.39 918.12,-737.39 1469.3,-737.39 1705.52,-737.39 1784.26,-737.39 1863,-737.39 -1640.94,-658.65 -1562.2,-658.65 -1483.46,-658.65 -853.54,-658.65 -696.05,-658.65 12.61,-658.65 91.35,-658.65 721.27,-658.65 800.01,-658.65 878.75,-658.65 1508.67,-658.65 1587.41,-658.65 1666.15,-658.65 1744.89,-658.65 1823.63,-658.65 1902.37,-658.65 1981.11,-658.65 2059.85,-658.65 -1680.31,-579.91 -1601.57,-579.91 -1522.83,-579.91 -1444.09,-579.91 -892.91,-579.91 -814.17,-579.91 -656.68,-579.91 -105.5,-579.91 130.72,-579.91 681.9,-579.91 760.64,-579.91 918.12,-579.91 1469.3,-579.91 1548.04,-579.91 1626.78,-579.91 1705.52,-579.91 1784.26,-579.91 1863,-579.91 1941.74,-579.91 2020.48,-579.91 -1719.68,-501.17 -1640.94,-501.17 -1562.2,-501.17 -1483.46,-501.17 -1404.72,-501.17 -1325.98,-501.17 -1247.24,-501.17 -1168.5,-501.17 -1089.76,-501.17 -1011.02,-501.17 -932.28,-501.17 -853.54,-501.17 -774.8,-501.17 -66.13,-501.17 12.61,-501.17 91.35,-501.17 800.01,-501.17 878.75,-501.17 957.49,-501.17 1036.23,-501.17 1114.97,-501.17 1193.71,-501.17 1272.45,-501.17 1351.19,-501.17 1429.93,-501.17 1508.67,-501.17 1587.41,-501.17 1666.15,-501.17 1744.89,-501.17 1823.63,-501.17 1902.37,-501.17 1981.11,-501.17 2059.85,-501.17 -1759.05,-422.43 -1680.31,-422.43 -1601.57,-422.43 -1522.83,-422.43 -1365.35,-422.43 -1286.61,-422.43 -892.91,-422.43 -814.17,-422.43 -735.42,-422.43 -577.94,-422.43 -499.2,-422.43 288.2,-422.43 524.42,-422.43 603.16,-422.43 760.64,-422.43 839.38,-422.43 918.12,-422.43 1075.6,-422.43 1311.82,-422.43 1469.3,-422.43 1548.04,-422.43 1626.78,-422.43 1705.52,-422.43 1784.26,-422.43 1863,-422.43 1941.74,-422.43 2020.48,-422.43 -2034.64,-343.69 -1955.9,-343.69 -1877.16,-343.69 -1798.42,-343.69 -1719.68,-343.69 -1640.94,-343.69 -1562.2,-343.69 -1404.72,-343.69 -932.28,-343.69 -853.54,-343.69 -774.8,-343.69 -696.05,-343.69 -617.31,-343.69 -144.87,-343.69 -66.13,-343.69 12.61,-343.69 170.09,-343.69 642.53,-343.69 800.01,-343.69 878.75,-343.69 957.49,-343.69 1429.93,-343.69 1508.67,-343.69 1587.41,-343.69 1666.15,-343.69 1744.89,-343.69 1823.63,-343.69 1902.37,-343.69 1981.11,-343.69 2059.85,-343.69 -2074.01,-264.95 -1995.27,-264.95 -1916.53,-264.95 -1837.79,-264.95 -1759.05,-264.95 -1680.31,-264.95 -1601.57,-264.95 -1522.83,-264.95 -1444.09,-264.95 -892.91,-264.95 -814.17,-264.95 -735.42,-264.95 -656.68,-264.95 681.9,-264.95 839.38,-264.95 918.12,-264.95 1469.3,-264.95 1548.04,-264.95 1626.78,-264.95 1705.52,-264.95 1784.26,-264.95 1863,-264.95 1941.74,-264.95 2020.48,-264.95 -2034.64,-186.21 -1955.9,-186.21 -1877.16,-186.21 -1798.42,-186.21 -1719.68,-186.21 -1640.94,-186.21 -1562.2,-186.21 -853.54,-186.21 -774.8,-186.21 -696.05,-186.21 -66.13,-186.21 12.61,-186.21 721.27,-186.21 800.01,-186.21 878.75,-186.21 1587.41,-186.21 1666.15,-186.21 1744.89,-186.21 1823.63,-186.21 1902.37,-186.21 1981.11,-186.21 2059.85,-186.21 -2074.01,-107.47 -1995.27,-107.47 -1916.53,-107.47 -1837.79,-107.47 -1759.05,-107.47 -1680.31,-107.47 -1601.57,-107.47 -1522.83,-107.47 -1444.09,-107.47 -892.91,-107.47 -814.17,-107.47 -735.42,-107.47 -656.68,-107.47 681.9,-107.47 839.38,-107.47 918.12,-107.47 1469.3,-107.47 1548.04,-107.47 1626.78,-107.47 1705.52,-107.47 1784.26,-107.47 1863,-107.47 1941.74,-107.47 2020.48,-107.47 -2034.64,-28.73 -1955.9,-28.73 -1877.16,-28.73 -1798.42,-28.73 -1719.68,-28.73 -1640.94,-28.73 -1562.2,-28.73 -853.54,-28.73 -774.8,-28.73 -66.13,-28.73 12.61,-28.73 721.27,-28.73 800.01,-28.73 1587.41,-28.73 1666.15,-28.73 1744.89,-28.73 1823.63,-28.73 1902.37,-28.73 1981.11,-28.73 2059.85,-28.73 -2074.01,50.01 -1995.27,50.01 -1916.53,50.01 -1837.79,50.01 -1759.05,50.01 -1680.31,50.01 -1601.57,50.01 -1522.83,50.01 -1444.09,50.01 -892.91,50.01 -814.17,50.01 -735.42,50.01 -656.68,50.01 681.9,50.01 918.12,50.01 1469.3,50.01 1548.04,50.01 1626.78,50.01 1705.52,50.01 1784.26,50.01 1863,50.01 1941.74,50.01 2020.48,50.01 -2034.64,128.75 -1955.9,128.75 -1877.16,128.75 -1798.42,128.75 -1719.68,128.75 -1640.94,128.75 -1562.2,128.75 -932.28,128.75 -853.54,128.75 -774.8,128.75 12.61,128.75 642.53,128.75 721.27,128.75 800.01,128.75 1429.93,128.75 1587.41,128.75 1666.15,128.75 1744.89,128.75 1823.63,128.75 1902.37,128.75 1981.11,128.75 2059.85,128.75 -2074.01,207.49 -1995.27,207.49 -1916.53,207.49 -1837.79,207.49 -1759.05,207.49 -1680.31,207.49 -1601.57,207.49 -1522.83,207.49 -1444.09,207.49 -1365.35,207.49 -1286.61,207.49 -892.91,207.49 -814.17,207.49 -735.42,207.49 -656.68,207.49 -577.94,207.49 -499.2,207.49 -262.98,207.49 -26.76,207.49 51.98,207.49 288.2,207.49 524.42,207.49 603.16,207.49 681.9,207.49 918.12,207.49 996.86,207.49 1075.6,207.49 1311.82,207.49 1390.56,207.49 1469.3,207.49 1548.04,207.49 1626.78,207.49 1705.52,207.49 1784.26,207.49 1863,207.49 1941.74,207.49 2020.48,207.49 -2034.64,286.23 -1955.9,286.23 -1877.16,286.23 -1798.42,286.23 -1719.68,286.23 -1640.94,286.23 -1562.2,286.23 -1404.72,286.23 -1325.98,286.23 -1247.24,286.23 -1089.76,286.23 -1011.02,286.23 -932.28,286.23 -774.8,286.23 -617.31,286.23 -538.57,286.23 -459.83,286.23 406.31,286.23 485.05,286.23 563.79,286.23 642.53,286.23 800.01,286.23 878.75,286.23 957.49,286.23 1036.23,286.23 1193.71,286.23 1272.45,286.23 1351.19,286.23 1429.93,286.23 1587.41,286.23 1666.15,286.23 1744.89,286.23 1823.63,286.23 1902.37,286.23 1981.11,286.23 2059.85,286.23 -2074.01,364.97 -1995.27,364.97 -1916.53,364.97 -1837.79,364.97 -1759.05,364.97 -1680.31,364.97 -1601.57,364.97 -1522.83,364.97 -1444.09,364.97 -1365.35,364.97 -1286.61,364.97 -1050.39,364.97 -971.65,364.97 -892.91,364.97 -735.42,364.97 -577.94,364.97 -499.2,364.97 445.68,364.97 524.42,364.97 603.16,364.97 839.38,364.97 918.12,364.97 996.86,364.97 1075.6,364.97 1233.08,364.97 1311.82,364.97 1390.56,364.97 1469.3,364.97 1548.04,364.97 1626.78,364.97 1705.52,364.97 1784.26,364.97 1863,364.97 1941.74,364.97 -2034.64,443.71 -1955.9,443.71 -1877.16,443.71 -1798.42,443.71 -1719.68,443.71 -1640.94,443.71 -1562.2,443.71 -1404.72,443.71 -1325.98,443.71 -1247.24,443.71 -1168.5,443.71 -1089.76,443.71 -1011.02,443.71 -932.28,443.71 -853.54,443.71 -774.8,443.71 91.35,443.71 170.09,443.71 406.31,443.71 485.05,443.71 642.53,443.71 721.27,443.71 800.01,443.71 878.75,443.71 957.49,443.71 1036.23,443.71 1114.97,443.71 1193.71,443.71 1272.45,443.71 1351.19,443.71 1429.93,443.71 1587.41,443.71 1666.15,443.71 1744.89,443.71 -2074.01,522.45 -1995.27,522.45 -1916.53,522.45 -1837.79,522.45 -1759.05,522.45 -1680.31,522.45 -1601.57,522.45 -1522.83,522.45 -1365.35,522.45 -1286.61,522.45 -1129.13,522.45 -1050.39,522.45 -971.65,522.45 -892.91,522.45 -814.17,522.45 -735.42,522.45 603.16,522.45 681.9,522.45 839.38,522.45 918.12,522.45 996.86,522.45 1075.6,522.45 1154.34,522.45 1233.08,522.45 1311.82,522.45 1390.56,522.45 1548.04,522.45 1626.78,522.45 1705.52,522.45 -2034.64,601.19 -1955.9,601.19 -1877.16,601.19 -1798.42,601.19 -1719.68,601.19 -1640.94,601.19 -1562.2,601.19 -1483.46,601.19 -1404.72,601.19 -1247.24,601.19 -1168.5,601.19 -1089.76,601.19 -1011.02,601.19 -932.28,601.19 -853.54,601.19 -774.8,601.19 -696.05,601.19 -617.31,601.19 -538.57,601.19 -459.83,601.19 -381.09,601.19 -223.61,601.19 -144.87,601.19 -66.13,601.19 1508.67,601.19 1587.41,601.19 1666.15,601.19 -2074.01,679.93 -1995.27,679.93 -1916.53,679.93 -1837.79,679.93 -1759.05,679.93 -1680.31,679.93 -1444.09,679.93 -1365.35,679.93 -1129.13,679.93 -1050.39,679.93 -971.65,679.93 -892.91,679.93 -814.17,679.93 -735.42,679.93 -656.68,679.93 -577.94,679.93 -499.2,679.93 -341.72,679.93 -262.98,679.93 -184.24,679.93 -105.5,679.93 -26.76,679.93 51.98,679.93 524.42,679.93 681.9,679.93 918.12,679.93 1154.34,679.93 1233.08,679.93 1311.82,679.93 1390.56,679.93 1469.3,679.93 -1798.42,758.67 -1719.68,758.67 -1483.46,758.67 -1404.72,758.67 -1325.98,758.67 -1247.24,758.67 -1089.76,758.67 -1011.02,758.67 -932.28,758.67 -853.54,758.67 -774.8,758.67 -696.05,758.67 -617.31,758.67 -538.57,758.67 -459.83,758.67 563.79,758.67 800.01,758.67 878.75,758.67 1036.23,758.67 1351.19,758.67 1429.93,758.67 1666.15,758.67 -1759.05,837.41 -1680.31,837.41 -1365.35,837.41 -1286.61,837.41 -1207.87,837.41 -971.65,837.41 -892.91,837.41 -814.17,837.41 -735.42,837.41 -656.68,837.41 -577.94,837.41 -499.2,837.41 445.68,837.41 524.42,837.41 918.12,837.41 996.86,837.41 1075.6,837.41 1154.34,837.41 1233.08,837.41 1311.82,837.41 1390.56,837.41 -1719.68,916.15 -1325.98,916.15 -1247.24,916.15 -1168.5,916.15 -1089.76,916.15 -932.28,916.15 -853.54,916.15 -774.8,916.15 -696.05,916.15 -617.31,916.15 -538.57,916.15 -459.83,916.15 485.05,916.15 1036.23,916.15 1193.71,916.15 1272.45,916.15 1351.19,916.15 -1680.31,994.89 -1365.35,994.89 -1286.61,994.89 -1207.87,994.89 -1129.13,994.89 -1050.39,994.89 -814.17,994.89 -735.42,994.89 -656.68,994.89 -577.94,994.89 -499.2,994.89 445.68,994.89 681.9,994.89 1154.34,994.89 1233.08,994.89 1311.82,994.89 1390.56,994.89 -1640.94,1073.63 -1404.72,1073.63 -1325.98,1073.63 -1247.24,1073.63 -1168.5,1073.63 -1089.76,1073.63 -1011.02,1073.63 -932.28,1073.63 1036.23,1073.63 1351.19,1073.63 1429.93,1073.63 1666.15,1073.63
  other v2: -291.34,-472.44 291.34,-472.44 145.67,-440.94 -287.4,-433.07 -1090.55,-421.26 -137.8,-417.32 -212.6,-401.57 -1472.44,-366.14 -515.75,-358.27 -1185.04,-354.33 -417.32,-354.33 -275.59,-350.39 70.87,-275.59 -133.86,-188.98 78.74,-114.17 -125.98,-11.81 74.8,35.43 -137.8,82.68 137.8,86.61 -59.06,90.55 200.79,153.54 -169.29,200.79 -82.68,200.79 157.48,204.72 -673.23,334.65 -692.91,421.26 -582.68,425.2 -263.78,425.2 291.34,425.2 -161.42,437.01 -625.98,480.31 -165.35,480.31 -287.4,484.25 139,503 361,527 248,533 467,535 397,562 196,565 549,565 1165,571 956.69,614.17 602.36,641.73 770,644 720.47,645.67 866.14,645.67 814.96,700.79 444.88,716.54 464.57,751.97 653.54,877.95 409.45,901.57 551.18,901.57 787.4,933.07 551.18,956.69 649.61,984.25 551.18,1035.43 657.48,1035.43 775.59,1035.43 -1155,1109 -1081,1109 -1007,1109 -933,1109 -859,1109 -785,1109 -711,1109 -637,1109 -563,1109 -489,1109 -415,1109 473,1109 547,1109 621,1109 695,1109 769,1109 843,1109 917,1109
LED1: IC1.4 LD1.2 | length 4064.5
  TopLayer w5: LD1.2 -1417.33,-452.75 -1500,-370.08 -1500,444.88 -857.88,1087 258.56,1087 326.3,1019.26 376.26,1019.26 447.56,1090.56 881.69,1090.56 905.51,1066.74 905.51,958.66 878.94,932.09 IC1.4
LED2: IC1.5 LD2.2 | length 2175.6
  TopLayer w5: LD2.2 -426.18,1022.64 -397.64,1051.18 245.82,1051.18 312,985 391,985 461.12,1055.12 692.91,1055.12 790.35,957.68 IC1.5
LED3: IC1.6 LD3.2 | length 4696.4
  TopLayer w5: LD3.2 -629.91,-452.75 -700.77,-381.89 -1425.2,-381.89 -1476.38,-330.71 -1476.38,440.94 -841.92,1075.4 254.6,1075.4 322,1008 381,1008 452.56,1079.56 877.13,1079.56 893.7,1062.99 893.7,1003.94 873.03,983.27 IC1.6
LED4: IC1.7 LD4.2 | length 2748.4
  TopLayer w5: LD4.2 -1213.58,676.18 -826.77,1062.99 245.01,1062.99 251.01,1062.99 317,997 387,997 456.93,1066.93 704.72,1066.93 762.8,1008.86 IC1.7
LED5: IC1.14 LD5.2 | length 1718.3
  TopLayer w5: LD5.2 629.93,-452.75 750,-332.68 750,667 704.72,712.28 704.72,879.92 678.15,906.5 IC1.14
LED6: IC1.13 LD6.2 | length 1167.5
  TopLayer w5: IC1.13 673.91,932.09 722,884 722,718.94 866.14,574.8 1133.86,574.8 1213.58,495.08 LD6.2
LED7: IC1.12 LD7.2 | length 2368.8
  TopLayer w5: IC1.12 671.87,957.68 740,889.55 740,724.57 874.02,590.55 1417.32,590.55 1523.62,484.25 1523.62,-295.28 1366.14,-452.76 LD7.2
LED8: IC1.11 LD8.2 | length 886.4
  TopLayer w5: LD8.2 426.18,886.81 522.64,983.27 IC1.11
NetB1_1: B1.1 C3.1 R3.1 | length 246.9
  TopLayer w20: B1.1 C3.1 1612.21,777.56 R3.1
NetB2_1: B2.1 C4.1 R4.1 | length 244.9
  TopLayer w20: C4.1 -1612.2,779.53 R4.1 B2.1
NetB3_1: B3.1 C5.1 R13.1 | length 246.9
  TopLayer w20: B3.1 C5.1 1612.2,-777.56 R13.1
NetB4_1: B4.1 C6.1 R14.1 | length 246.9
  TopLayer w20: R14.1 -1612.2,-777.56 C6.1 B4.1
NetLD1_1: LD1.1 R5.1 | length 113.2
  TopLayer w5: LD1.1 R5.1
NetLD2_1: LD2.1 R6.1 | length 91
  TopLayer w5: R6.1 -362.2,217.53 LD2.1
NetLD3_1: LD3.1 R7.1 | length 113.2
  TopLayer w5: LD3.1 R7.1
NetLD4_1: LD4.1 R8.1 | length 91
  TopLayer w5: R8.1 -1149.61,217.53 LD4.1
NetLD5_1: LD5.1 R9.1 | length 113.2
  TopLayer w5: R9.1 LD5.1
NetLD6_1: LD6.1 R10.1 | length 91
  TopLayer w5: LD6.1 1149.61,217.52 R10.1
NetLD7_1: LD7.1 R11.1 | length 113.2
  TopLayer w5: R11.1 LD7.1
NetLD8_1: LD8.1 R12.1 | length 91
  TopLayer w5: LD8.1 361.22,306.1 R12.1
NetR1_1: R1.1 SW2.1 | length 85.7
  TopLayer w5: SW2.1 982.43,1054.97 R1.1@982.43,970.07
NetR2_1: R2.1 SW2.2 | length 85.3
  TopLayer w5: R2.1@1081.89,970.2 SW2.2
pads on no net: IC1.9 IC1.10 J17.MTG1 J17.MTG2 Standoff1.1 Standoff2.1 Standoff3.1 Standoff4.1 SW2.3 SW2.4 SW2.5 SW2.6

## Polygon pours and split planes (outlines as drawn)
GND on BottomLayer "L3-No Net" (solid, remove dead copper, pour order 142): -2316.93,-1220.47 -2316.93,1230.31 2316.93,1230.31 2316.93,-1220.47
DAC_OUT3_N on BottomLayer "DAC_OUT3_N_L02_P141" (solid, pour order 141): -629.93,-574.8 cw(c-590.56,-574.8) -590.56,-535.43 -196.86,-535.43 cw(c-196.86,-574.8) -157.49,-574.8 -157.49,-960.63 cw(c-196.86,-960.63) -196.86,-1000 -590.56,-1000 cw(c-590.56,-960.63) -629.93,-960.63
DAC_OUT5_N on BottomLayer "DAC_OUT5_N_L02_P140" (solid, pour order 140): 157.47,-574.8 cw(c196.84,-574.8) 196.84,-535.43 590.55,-535.43 cw(c590.55,-574.8) 629.92,-574.8 629.92,-960.63 cw(c590.55,-960.63) 590.55,-1000 196.84,-1000 cw(c196.84,-960.63) 157.47,-960.63
DAC_OUT7_N on BottomLayer "DAC_OUT7_N_L02_P139" (solid, pour order 139): 944.88,-574.8 cw(c984.25,-574.8) 984.25,-535.43 1377.95,-535.43 cw(c1377.95,-574.8) 1417.32,-574.8 1417.32,-960.63 cw(c1377.95,-960.63) 1377.95,-1000 984.25,-1000 cw(c984.25,-960.63) 944.88,-960.63
DAC_OUT6_N on BottomLayer "DAC_OUT6_N_L02_P138" (solid, pour order 138): 944.88,94.49 cw(c984.25,94.49) 984.25,133.86 1377.95,133.86 cw(c1377.95,94.49) 1417.32,94.49 1417.32,-291.34 cw(c1377.95,-291.34) 1377.95,-330.71 984.25,-330.71 cw(c984.25,-291.34) 944.88,-291.34
DAC_OUT8_N on BottomLayer "DAC_OUT8_N_L02_P137" (solid, pour order 137): 157.48,94.49 cw(c196.85,94.49) 196.85,133.86 590.55,133.86 cw(c590.55,94.49) 629.92,94.49 629.92,-291.34 cw(c590.55,-291.34) 590.55,-330.71 196.85,-330.71 cw(c196.85,-291.34) 157.48,-291.34
DAC_OUT2_N on BottomLayer "DAC_OUT2_N_L02_P136" (solid, pour order 136): -629.92,94.49 cw(c-590.55,94.49) -590.55,133.86 -196.85,133.86 cw(c-196.85,94.49) -157.48,94.49 -157.48,-291.34 cw(c-196.85,-291.34) -196.85,-330.71 -590.55,-330.71 cw(c-590.55,-291.34) -629.92,-291.34
DAC_OUT4_N on BottomLayer "DAC_OUT4_N_L02_P130" (solid, pour order 130): -1417.32,94.49 cw(c-1377.95,94.49) -1377.95,133.86 -984.25,133.86 cw(c-984.25,94.49) -944.88,94.49 -944.88,-291.34 cw(c-984.25,-291.34) -984.25,-330.71 -1377.95,-330.71 cw(c-1377.95,-291.34) -1417.32,-291.34
DAC_OUT1_N on BottomLayer "DAC_OUT1_N_L02_P126" (solid, pour order 126): -1417.33,-574.8 cw(c-1377.96,-574.8) -1377.96,-535.43 -984.26,-535.43 cw(c-984.26,-574.8) -944.89,-574.8 -944.89,-960.63 cw(c-984.26,-960.63) -984.26,-1000 -1377.96,-1000 cw(c-1377.96,-960.63) -1417.33,-960.63
GND on TopLayer "L3-No Net" (solid, remove dead copper, pour order 117): -2308.91,-1217.26 -2307.53,1223.68 2321.66,1223.68 2325.5,-1217.26

## Silkscreen, mask and mechanical layers (free items; w line width, h text height)
TopOverlay:
  text "eSAS BNC/MCX adapter v1.0" at -488.26,645.67 h78.74
  text "BNC4" at -1318.89,-413.39 h78.74
  text "BNC2" at -531.49,-413.39 h78.74
  text "BNC8" at 255.91,-413.39 h78.74
  text "BNC6" at 1043.31,-413.39 h78.74
  text "BNC1" at -1318.9,-1082.68 h78.74
  text "BNC3" at -531.5,-1082.68 h78.74
  text "BNC5" at 255.91,-1082.68 h78.74
  text "BNC7" at 1043.31,-1082.68 h78.74
Mechanical1:
  lines w3.94: -2111.37,-311.84 ccw(c-2040.37,-308.08) -2036.62,-379.08 ; -2111.38,666.17 cw(c-2040.38,662.41) -2036.62,733.42 ; -2111.31,-314.96 -2111.31,669.3 ; -2035.12,-379.05 cw(c-2026.62,-688.03) -1717.65,-679.54 ; -2033.49,733.34 ccw(c-2033.5,1049.25) -1717.59,1049.25 ; -1717.67,1052.37 cw(c-1646.66,1056.13) -1650.42,1127.13 ; -1717.6,-1062.99 ccw(c-1653.54,-1062.99) -1653.54,-1127.04 1653.55,-1127.05 ; -1717.63,-1062.45 -1717.63,-680.62 ; -1653.54,1127.06 1653.55,1127.06 ; 1650.42,-1127.12 ccw(c1646.67,-1056.12) 1717.67,-1052.36 ; 1653.55,1127.05 cw(c1653.55,1063) 1717.6,1063 ; 1717.61,-1052.36 cw(c2033.5,-1049.24) 2036.62,-733.35 ; 1717.65,679.55 ccw(c2026.63,688.04) 2035.12,379.06 ; 1717.61,681.17 1717.61,1063 ; 2036.62,-733.41 ccw(c2040.38,-662.41) 2111.38,-666.16 ; 2036.62,379.09 cw(c2040.38,308.09) 2111.15,314.95 ; 2111.31,-666.16 2111.31,314.97
Mechanical4:
  lines w10: -1427.16,-708.65 1761.81,-708.65
Mechanical8:
  circle w5: c0,0 r78.74
  lines w3.94: -2001.65,988.53 -1754.65,988.53 ; -1979.65,-5030.25 1995.36,-5030.25 ; -1971.65,988.53 -1971.65,1128.74 -1971.65,-1183.46 ccw(c-1850.94,-1183.46) -1936.3,-1268.82 ; 1965.36,-5170.47 1965.36,-5030.25
  lines w5: -125.98,0 0,0 ; 0,-125.98 0,0 ; 0,125.98 0,0 ; 125.98,0 0,0

## Text inside footprints (layer, text, board x,y; h text height)
J17: Mechanical14 "A1" at 257.87,470.47 h47.24 r180; Mechanical14 "B1" at 291.34,208.66 h47.24 r180; BottomOverlay "A1" at 257.87,470.47 h47.24 r180; BottomOverlay "B1" at 291.34,208.66 h47.24 r180; Mechanical8 "PCB Edge" at -158.46,1208.66 h47.24 r180
SW2: BottomOverlay "1" at 918.31,1144.68 h39.37 r180; BottomOverlay "4" at 1329.72,1141.73 h39.37 r180